# Altium PCB PCB_LM1117MP-5.0.PcbDoc
Units mil, origin at the board's own origin, x right, y up, seen from the top; angles counter-clockwise.
Board outline not stored, 2 copper layers (Top Layer, Bottom Layer); 8 components, 0 nets, 18 pads, 5 vias.
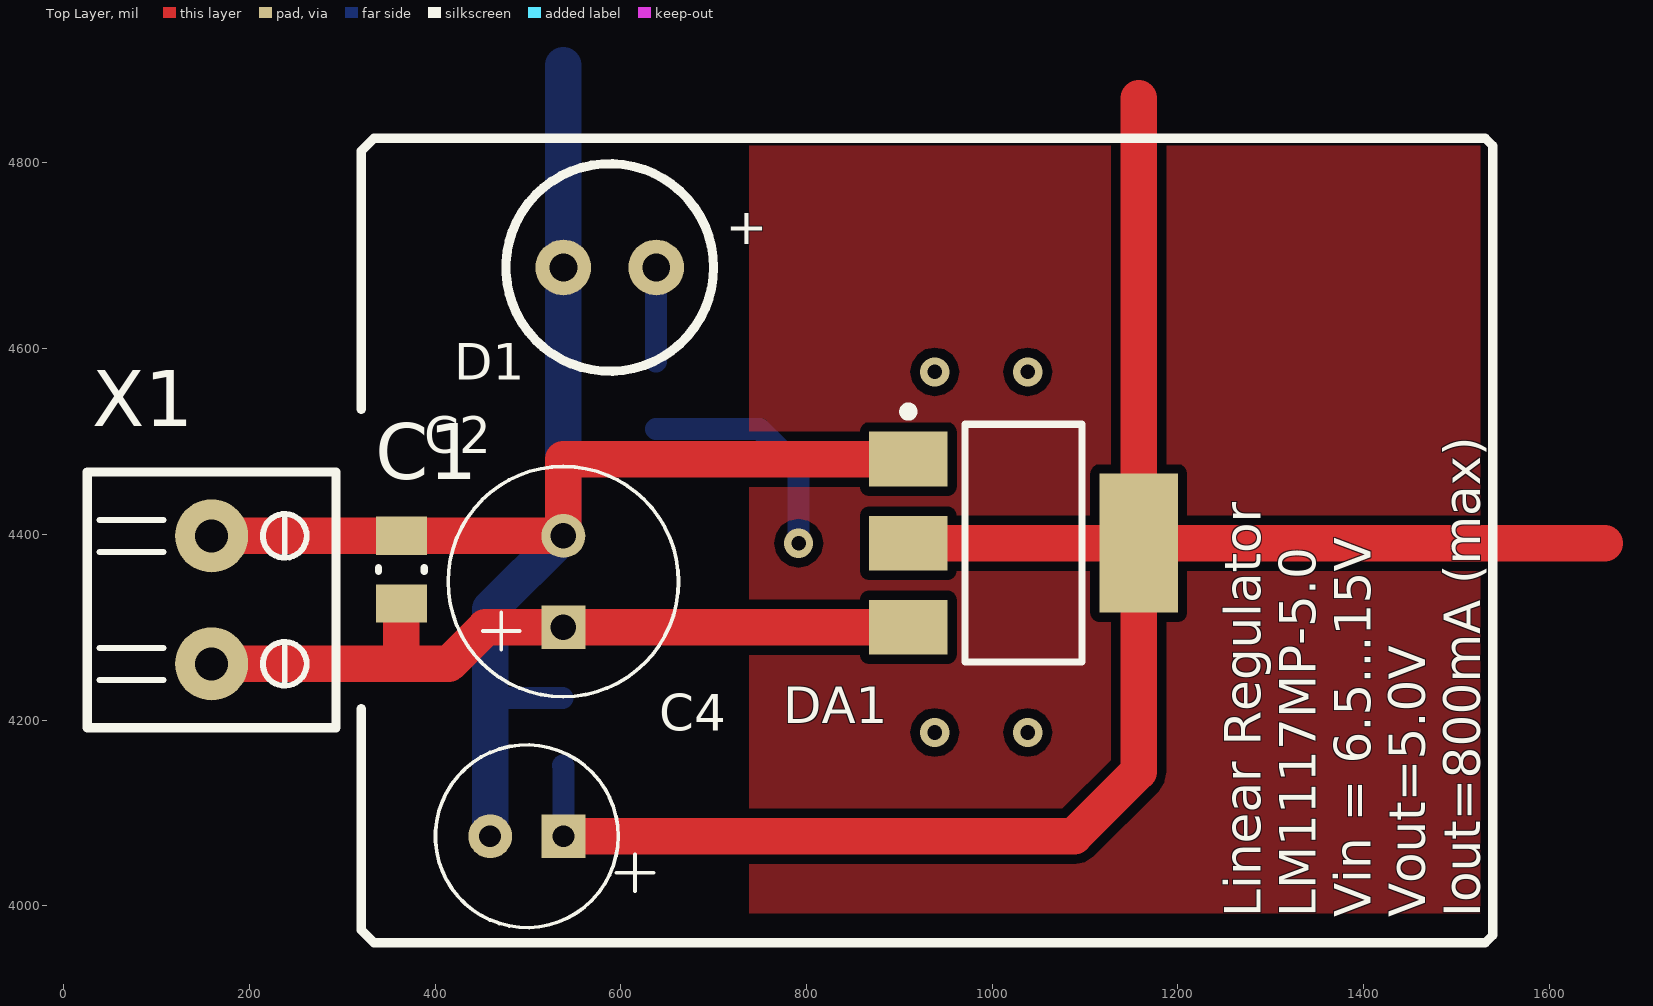
[diagram p0: Top Layer view]
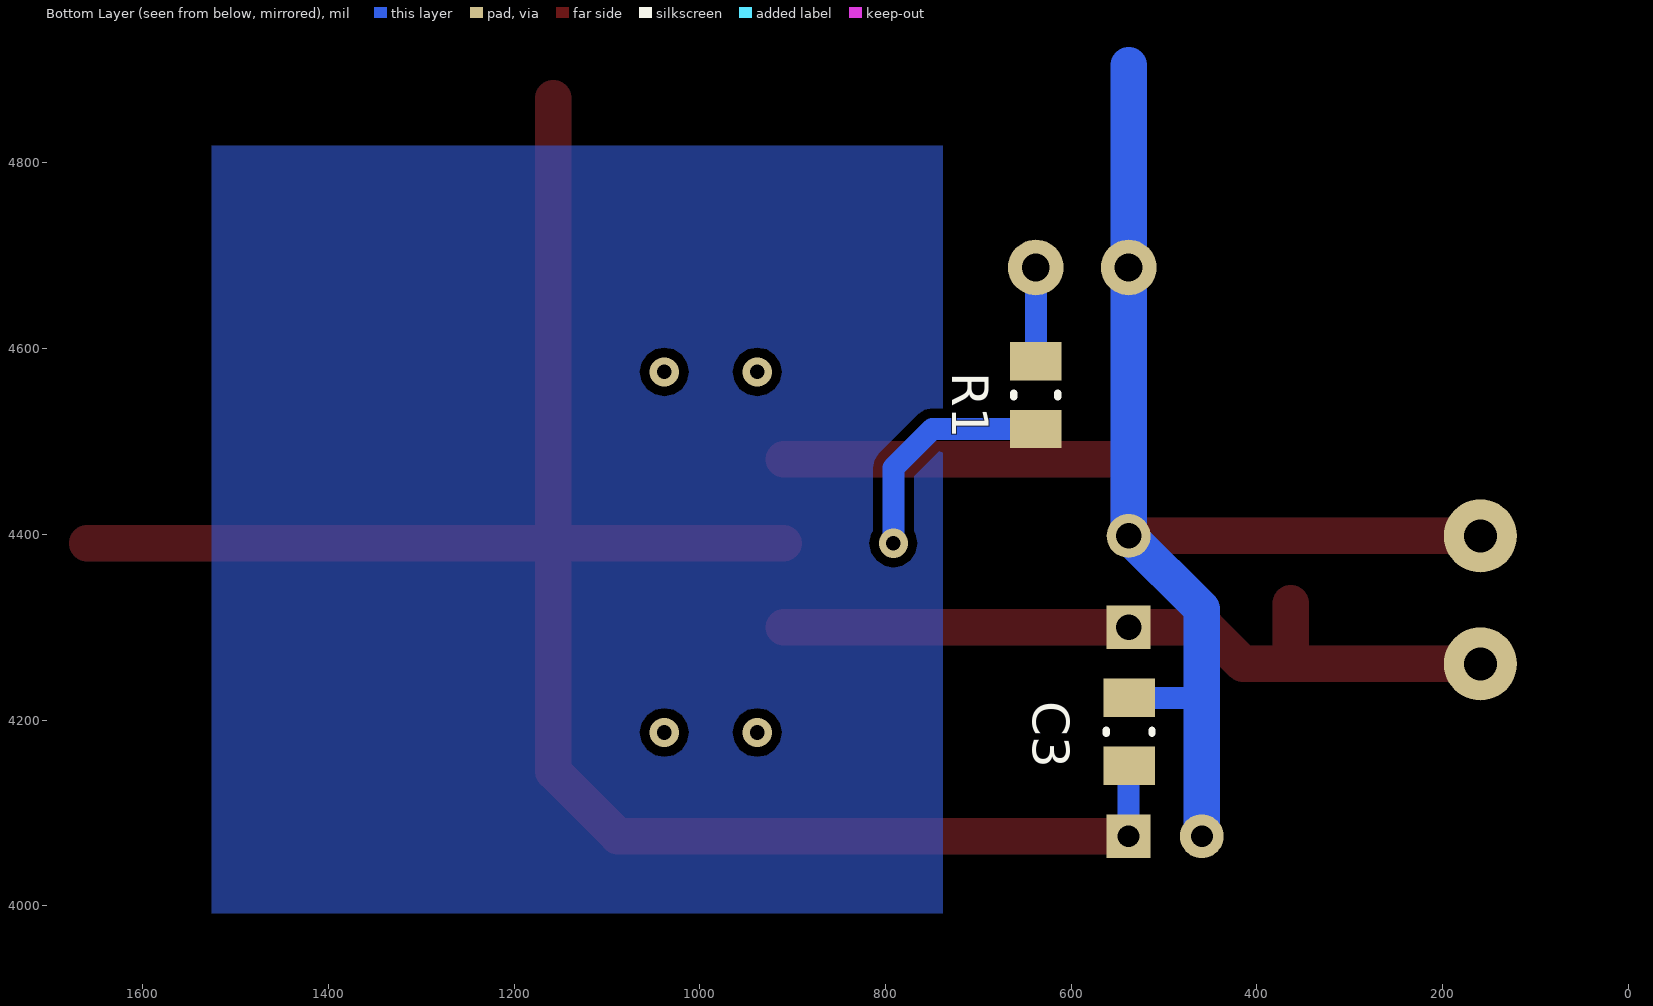
[diagram p1: Bottom Layer view, seen from below]

## Layer stack, top to bottom
Top Solder: solder mask 0.4, Solder Resist, Dk 3.5
Top Layer: signal copper 1.4
Dielectric 1: dielectric 12.6, FR-4, Dk 4.8
Bottom Layer: signal copper 1.4
Bottom Solder: solder mask 0.4, Solder Resist, Dk 3.5

## Components (designator, comment, footprint, x,y, rotation, side; value= is the part's Value field where it differs from the comment)
C1 "100nF" Capacitor_0805 363.81,4362.01 r90 top
C2 "47uF" Capacitor_Electrolit_6.3x11 538.19,4300 r90 top
C3 "10nF" Capacitor_0805 537.57,4187.5 r90 bottom
C4 "47uF" CAPACITOR+_22uFx25V 538.19,4075 r180 top
D1 "LED_2.54mm_R" LED_2.54mm_R 538.19,4687.5 r0 top
DA1 "LM1117MP-5.0" NCP1117_SOT223 1033.71,4390.55 r0 top
R1 "1k" RESISTOR_SMD0805 638.19,4550 r270 bottom
X1 "Connector_DG350-3.5-02P-14" CONNECTOR_DG350-3.5-02P-14 159.45,4398.43 r270 top

## Footprints (in the part's own frame and the unit in brackets; to place one, negate y for a bottom-side part, rotate by r counter-clockwise, add the part's x,y. Pads: shape width x height; smd on the part's side, far side on the other; paste and mask are expansions set on the pad)
CAPACITOR+_22uFx25V [mm]
  rect 1.2x1.2 hole 0.6 mask+0.1: 1(0,0)
  round 1.2 hole 0.6 mask+0.1: 2(2,0)
  silkscreen extent -2.47,-2.5 3.5,2.5, body extent -1.11,-2.11 3.11,2.11, height 7.19
Capacitor_0805 [mm]
  rect 1.05x1.4 smd: 1(-0.925,0) 2(0.925,0)
  silkscreen extent -0.05,-0.63 0.05,0.63, body extent -1,-0.63 1,0.63, height 1.3
Capacitor_Electrolit_6.3x11 [mm]
  rect 1.2x1.2 hole 0.7 mask+0.1: 1(0,0)
  round 1.2 hole 0.7 mask+0.1: 2(2.5,0)
  silkscreen extent -1.9,-3.15 4.4,3.15, body extent -1.87,-3.15 4.42,3.15, height 11.8
CONNECTOR_DG350-3.5-02P-14 [mm]
  round 2 hole 0.9: 1(0,0) 2(3.5,0)
  silkscreen extent -1.75,-3.4 5.25,3.4, body extent -2.25,-3.4 5.75,3.4, height 8.4
LED_2.54mm_R [mil]
  round 60 hole 30 mask+3.94: 1(0,0) 2(100,0)
  silkscreen extent -62,-112 162,112, body extent -45,-115 165,115, height 343
NCP1117_SOT223 [mm]
  rect 2.15x1.5 smd: 1(-3.15,2.3) 2(-3.15,0) 3(-3.15,-2.3)
  rect 2.15x3.8 smd: 2(3.15,0)
  silkscreen extent -3.27,-3.25 1.6,3.72, body extent -3.65,-3.35 3.65,3.35, height 1.8
RESISTOR_SMD0805 [mm]
  rect 1.05x1.4 smd: 1(-0.925,0) 2(0.925,0)
  silkscreen extent -0.05,-0.6 0.05,0.6, body extent -1.1,-0.7 1.1,0.7, height 0.5

## Part data
C1 C3: library part Capacitor_0805
C2: library part Capacitor+_6.3x11
C4: library part Capacitor+_22uFx25V
R1: library part Resistor_0805

## Via types
v1: diameter 31.5, hole 15.75, Top Layer to Bottom Layer, 5 vias

## Nets (pads, with @x,y where several pads share a name; then routed paths per layer and width w, separated by ;. In a path a pad name is that pad's centre, name@x,y a point inside that pad or via, vN(x,y) a via of type N, cw(c..) or ccw(c..) an arc to the next point about the centre after c; other vN are vias at no path point)
pads on no net: C1.1 C1.2 C2.1 C2.2 C3.1 C3.2 C4.1 C4.2 D1.1 D1.2 DA1.1 DA1.2 DA1.3 R1.1 R1.2 X1.1 X1.2
copper on no net: | length 5160.3
  Top Layer w39.37: 159.45,4260.63 359.45,4260.63 ; 159.45,4398.43 363.81,4398.43 538.19,4398.43 538.19,4481.1 909.69,4481.1 ; 363.81,4325.59 363.81,4264.99 359.45,4260.63 ; 538.19,4075 1088.19,4075 1157.72,4144.53 1157.72,4390.55 ; 909.69,4300 538.19,4300 454.3,4300 414.93,4260.63 359.45,4260.63 ; 909.69,4390.55 1157.72,4390.55 ; 1157.72,4869.73 1157.72,4390.55 ; 1659.59,4390.55 1157.72,4390.55
  Bottom Layer w23.62: 459.45,4225 460.53,4223.92 537.57,4223.92 ; 537.57,4151.08 538.19,4150.46 538.19,4075 ; 638.19,4513.58 749.61,4513.58 791.57,4471.61 v1(791.57,4390.55) ; 638.19,4586.42 638.19,4687.5
  Bottom Layer w39.37: 459.45,4075 459.45,4225 459.45,4319.69 538.19,4398.43 538.19,4687.5 538.19,4905.16
  other v1: 938.19,4186.71 1038.19,4186.71 938.19,4575 1038.19,4575

## Polygon pours and split planes (outlines as drawn)
no net on Top Layer "Top Layer-No Net 1" (solid, pour order 2): 738.19,4818.7 1525.59,4818.7 1525.59,3991.93 738.19,3991.93
no net on Bottom Layer "Top Layer-No Net 1" (solid, pour order 0): 1525.59,4818.7 738.19,4818.7 738.19,3991.93 1525.59,3991.93

## Other copper
Bottom Layer:
  pour cut-out: 500.17,4254.43 574.97,4254.43 574.97,4120.57 500.17,4120.57

## Silkscreen, mask and mechanical layers (free items; w line width, h text height)
Top Overlay:
  lines w10: 320.67,4212.4 320.67,3989.76 320.67,3974.02 334.25,3960.43 1531.1,3960.43 1538.98,3968.31 1538.98,4818.7 1531.1,4826.57 334.25,4826.57 320.67,4812.99 320.67,4795.08 320.67,4534.85
  text "Linear Regulator / LM1117MP-5.0 / Vin = 6.5...15V / Vout=5.0V / Iout=800mA (max)" at 1525.69,3987.5 h39.37 r90

## Text inside footprints (layer, text, board x,y; h text height)
D1: Top Overlay "+" at 713.19,4712.5 h39.37